# Altium PCB AMC_Single_uBACKPLANE.PcbDoc (part 2 of 2)
Units mm, origin at the board's own origin, x right, y up, seen from the top; angles counter-clockwise.
Board outline 54.63 x 82.6 mm, 4 copper layers (TOP, GND, PWR, BTM), stack 1.618 mm thick; 29 components, 100 nets, 344 pads, 209 vias.
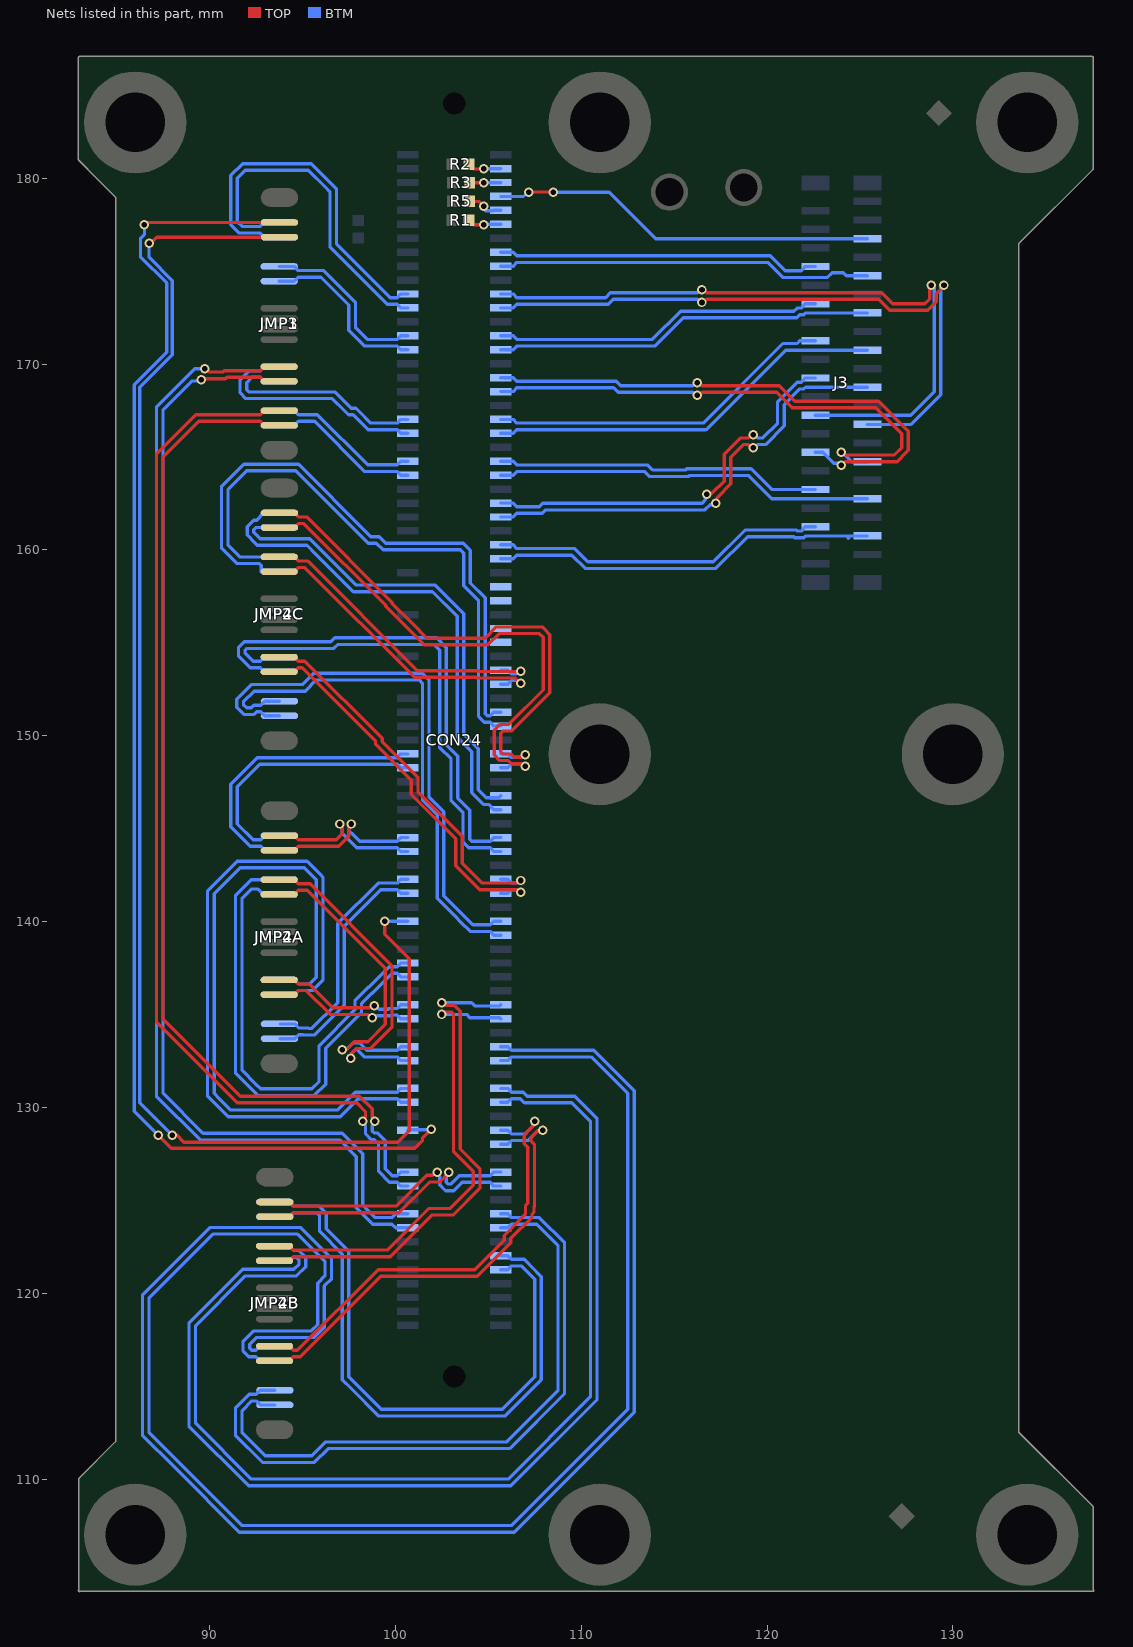
[diagram p4: the nets of this part, all layers, seen from the top]

## Via types
v1: diameter 0.5, hole 0.3, TOP to BTM, tented both sides, 99 vias
v2: diameter 0.51, hole 0.3, TOP to BTM, tented both sides, 88 vias
v3: diameter 0.51, hole 0.3, TOP to BTM, 12 vias
v4: diameter 0.5, hole 0.2, TOP to BTM, tented both sides, 10 vias

## Nets (pads, with @x,y where several pads share a name; then routed paths per layer and width w, separated by ;. In a path a pad name is that pad's centre, name@x,y a point inside that pad or via, vN(x,y) a via of type N, cw(c..) or ccw(c..) an arc to the next point about the centre after c; other vN are vias at no path point) (continued)
QRX2A_N: CON24.54 JMP4A.2 | length 12.8
  BTM w0.178: JMP4A.2@93.794,133.7 94.592,133.7 94.809,133.917 95.026,133.917 95.049,133.894 95.647,133.894 97.25,135.497 97.25,139.75 99.217,141.717 100.102,141.717 100.299,141.52 CON24.54@100.674,141.52
QRX2A_P: CON24.53 JMP4A.3 | length 12.8
  BTM w0.178: JMP4A.3@93.794,134.49 94.592,134.49 94.809,134.273 95.322,134.273 95.345,134.25 95.5,134.25 96.894,135.644 96.894,139.897 99.07,142.073 100.102,142.073 100.299,142.27 CON24.53@100.674,142.27
QRX2B_N: CON24.93 JMP4B.2 | length 33.7
  BTM w0.178: JMP4B.2@93.522,113.99 92.724,113.99 92.507,114.207 92.281,114.207 91.75,113.676 91.75,112.5 93,111.25 95.497,111.25 96.247,112 105.997,112 108.75,114.753 108.75,122.57 107.603,123.717 106.246,123.717 106.049,123.52 CON24.93@105.674,123.52
QRX2B_P: CON24.94 JMP4B.3 | length 36
  BTM w0.178: JMP4B.3@93.522,114.78 92.724,114.78 92.507,114.563 92.134,114.563 91.394,113.824 91.394,112.353 92.853,110.894 95.644,110.894 96.394,111.644 106.144,111.644 109.106,114.606 109.106,122.717 107.75,124.073 106.246,124.073 106.049,124.27 CON24.94@105.674,124.27
QRX2C_N: CON24.115 JMP4C.2 | length 29.8
  BTM w0.178: JMP4C.2@93.772,151.07 92.974,151.07 92.757,151.287 92.54,151.287 92.397,151.144 91.853,151.144 91.469,151.528 91.469,151.969 92.251,152.751 94.999,152.751 95.603,153.356 101.438,153.356 101.813,152.98 101.813,146.689 102.606,145.897 102.606,141.394 104.177,139.823 105.102,139.823 105.299,140.02 CON24.115@105.674,140.02
QRX2C_P: CON24.114 JMP4C.3 | length 28.7
  BTM w0.178: JMP4C.3@93.772,151.86 92.974,151.86 92.757,151.643 92.392,151.643 92.249,151.5 92,151.5 91.825,151.675 91.825,151.822 92.399,152.396 95.146,152.396 95.75,153 101.29,153 101.458,152.832 101.458,146.542 102.25,145.75 102.25,141.247 103.247,140.25 103.499,139.999 104.03,139.467 105.102,139.467 105.299,139.27 CON24.114@105.674,139.27
QRX3A_N: CON24.63 JMP2A.11 | length 7.8
  TOP w0.178: JMP2A.11@93.75,136.07 94.548,136.07 94.765,136.287 95.21,136.287 96.496,135.001 98.489,135.001 98.66,134.83 v2(98.75,134.83)
  BTM w0.178: v2(98.75,134.83) 98.814,134.894 98.98,134.894 99.02,134.933 99.767,134.933 99.801,134.967 100.102,134.967 100.299,134.77 CON24.63@100.674,134.77
QRX3A_P: CON24.62 JMP2A.10 | length 7.8
  TOP w0.178: JMP2A.10@93.75,136.86 94.548,136.86 94.765,136.643 95.357,136.643 95.75,136.25 96.644,135.356 98.596,135.356 98.636,135.396 98.802,135.396 v2(98.866,135.46)
  BTM w0.178: v2(98.866,135.46) 98.956,135.46 99.127,135.289 99.62,135.289 99.653,135.323 100.102,135.323 100.299,135.52 CON24.62@100.674,135.52
QRX3B_N: CON24.99 JMP2B.11 | length 25
  TOP w0.178: JMP2B.11@93.5,116.36 94.298,116.36 94.515,116.577 94.88,116.577 99.217,120.914 104.417,120.914 106.216,122.713 106.216,122.96 107.356,124.1 107.356,124.25 107.457,124.352 107.457,124.651 107.489,124.683 107.489,128 107.292,128.197 107.292,128.345 107.395,128.448 107.395,128.482 107.63,128.718 107.859,128.718 v2(107.922,128.781)
  BTM w0.178: CON24.99@105.674,128.02 106.049,128.02 106.246,128.217 107.13,128.217 107.63,128.718 107.859,128.718 v2(107.922,128.781)
QRX3B_P: CON24.100 JMP2B.10 | length 24.4
  TOP w0.178: JMP2B.10@93.5,117.15 94.298,117.15 94.515,116.933 94.732,116.933 99.07,121.27 104.27,121.27 105.86,122.86 105.86,123.107 107,124.247 107,124.697 107.133,124.83 107.133,127.853 106.936,128.05 106.936,128.492 107.039,128.595 107.039,128.63 107.436,129.027 107.436,129.186 v2(107.5,129.25)
  BTM w0.178: CON24.100@105.674,128.77 106.049,128.77 106.246,128.573 106.982,128.573 107.436,129.027 107.436,129.186 v2(107.5,129.25)
QRX3C_N: CON24.117 JMP2C.11 | length 20.7
  TOP w0.178: JMP2C.11@93.75,153.44 94.548,153.44 94.765,153.657 94.982,153.657 98.934,149.706 98.934,149.538 100.86,147.612 100.86,146.837 103.25,144.447 103.25,142.997 104.53,141.717 106.523,141.717 106.66,141.58 v2(106.75,141.58)
  BTM w0.178: CON24.117@105.674,141.52 106.049,141.52 106.246,141.717 106.523,141.717 106.66,141.58 v2(106.75,141.58)
QRX3C_P: CON24.118 JMP2C.10 | length 20.7
  TOP w0.178: JMP2C.10@93.75,154.23 94.548,154.23 94.765,154.013 95.13,154.013 99.289,149.853 99.289,149.685 101.216,147.759 101.216,146.985 103.606,144.594 103.606,143.144 104.677,142.073 106.523,142.073 106.66,142.21 v2(106.75,142.21)
  BTM w0.178: CON24.118@105.674,142.27 106.049,142.27 106.246,142.073 106.523,142.073 106.66,142.21 v2(106.75,142.21)
QRX4A_N: CON24.69 JMP4A.4 | length 38.2
  BTM w0.178: JMP4A.4@93.772,136.07 94.57,136.07 94.787,136.287 95.54,136.287 96.106,136.853 96.106,142.397 96.001,142.501 95.251,143.252 91.499,143.252 89.894,141.647 89.894,130.603 90.499,129.999 90.997,129.5 97.033,129.5 98,130.467 100.102,130.467 100.299,130.27 CON24.69@100.674,130.27
QRX4A_P: CON24.68 JMP4A.5 | length 35.8
  BTM w0.178: JMP4A.5@93.772,136.86 94.57,136.86 94.787,136.643 95.393,136.643 95.75,137 95.75,142.25 95.103,142.897 91.647,142.897 90.25,141.5 90.25,130.75 90.499,130.501 91.144,129.856 96.886,129.856 97.853,130.823 100.102,130.823 100.299,131.02 CON24.68@100.674,131.02
QRX4B_N: CON24.105 JMP4B.4 | length 84.3
  BTM w0.178: JMP4B.4@93.5,116.36 92.702,116.36 92.485,116.577 92.12,116.577 91.808,116.89 91.808,117.41 92.369,117.971 95.471,117.971 95.819,118.319 95.819,120.54 96.211,120.932 96.211,121.716 94.74,123.187 90.187,123.187 86.75,119.75 86.75,112.5 88.5,110.75 91.75,107.5 106.25,107.5 112.5,113.75 112.5,130.75 110.75,132.5 110.533,132.717 106.246,132.717 106.049,132.52 CON24.105@105.674,132.52
QRX4B_P: CON24.106 JMP4B.5 | length 86.6
  BTM w0.178: JMP4B.5@93.5,117.15 92.702,117.15 92.485,116.933 92.268,116.933 92.163,117.037 92.163,117.263 92.516,117.616 95.618,117.616 96.174,118.171 96.174,120.392 96.567,120.785 96.567,121.863 95.715,122.715 95.158,123.272 94.888,123.542 90.039,123.542 86.394,119.897 86.394,112.353 88.123,110.624 91.603,107.144 106.397,107.144 112.856,113.603 112.856,130.897 111.253,132.5 110.68,133.073 106.246,133.073 106.049,133.27 CON24.106@105.674,133.27
QRX4C_N: CON24.121 JMP4C.4 | length 27.2
  BTM w0.178: JMP4C.4@93.75,153.44 92.952,153.44 92.735,153.657 92.196,153.657 91.556,154.297 91.556,154.739 91.868,155.051 96.537,155.051 96.75,155.265 102.221,155.265 102.747,154.739 102.747,149.506 103.356,148.897 103.356,146.644 104,146 104,144.427 104.104,144.323 105.102,144.323 105.299,144.52 CON24.121@105.674,144.52
QRX4C_P: CON24.120 JMP4C.5 | length 26.1
  BTM w0.178: JMP4C.5@93.75,154.23 92.952,154.23 92.735,154.013 92.343,154.013 91.912,154.444 91.912,154.591 92.016,154.695 96.684,154.695 96.897,154.909 102.074,154.909 102.391,154.591 102.391,149.359 103,148.75 103,146.497 103.644,145.853 103.644,144.28 103.957,143.967 105.102,143.967 105.299,143.77 CON24.120@105.674,143.77
QTX1A_N: CON24.45 JMP4A.13 | length 14.5
  BTM w0.178: JMP4A.13@93.772,144.62 92.974,144.62 92.757,144.403 92.347,144.403 91.5,145.25 91.5,147.25 92.717,148.467 100.102,148.467 100.299,148.27 CON24.45@100.674,148.27
QTX1A_P: CON24.44 JMP4A.12 | length 15.7
  BTM w0.178: JMP4A.12@93.772,143.83 92.974,143.83 92.757,144.047 92.2,144.047 91.144,145.103 91.144,147.397 92.57,148.823 100.102,148.823 100.299,149.02 CON24.44@100.674,149.02
QTX1B_N: CON24.90 JMP4B.13 | length 31.2
  BTM w0.178: JMP4B.13@93.5,124.91 94.298,124.91 94.515,124.693 95.897,124.693 96.279,124.311 96.279,123.471 97.5,122.25 97.5,115.5 98,115 99.25,113.75 105.747,113.75 107.5,115.503 107.5,120.75 106.783,121.467 106.246,121.467 106.049,121.27 CON24.90@105.674,121.27
QTX1B_P: CON24.91 JMP4B.12 | length 32.4
  BTM w0.178: JMP4B.12@93.5,124.12 94.298,124.12 94.515,124.337 95.75,124.337 95.923,124.164 95.923,123.324 97.144,122.103 97.144,115.353 97.623,114.874 99.103,113.394 105.894,113.394 107.856,115.356 107.856,120.897 107.647,121.106 107.501,121.251 106.93,121.823 106.246,121.823 106.049,122.02 CON24.91@105.674,122.02
QTX1C_N: CON24.123 JMP4C.13 | length 27.3
  BTM w0.178: JMP4C.13@93.75,161.99 92.925,161.99 92.535,161.6 92.382,161.6 92.025,161.243 92.025,160.801 92.129,160.697 92.328,160.499 92.576,160.25 95.247,160.25 95.749,159.749 97.747,157.75 102,157.75 103.325,156.425 103.325,149.925 104.104,149.146 104.104,146.94 104.741,146.303 105.016,146.303 105.299,146.02 CON24.123@105.674,146.02
QTX1C_P: CON24.124 JMP4C.12 | length 25.9
  BTM w0.178: JMP4C.12@93.75,161.2 92.485,161.2 92.381,161.096 92.381,160.949 92.724,160.606 95.394,160.606 95.749,160.251 97.894,158.106 102.147,158.106 103.68,156.573 103.68,150.073 104.46,149.293 104.46,147.088 104.889,146.659 105.563,146.659 CON24.124@105.674,146.77
QTX2A_N: CON24.51 JMP2A.2 | length 8.7
  TOP w0.178: JMP2A.2@93.772,144.62 94.57,144.62 94.787,144.403 96.819,144.403 97.144,144.728 97.144,145.023 97.007,145.16 v2(97.007,145.25)
  BTM w0.178: v2(97.007,145.25) 97.007,145.16 97.144,145.023 97.144,144.75 97.927,143.967 100.102,143.967 100.299,143.77 CON24.51@100.674,143.77
QTX2A_P: CON24.50 JMP2A.3 | length 8.7
  TOP w0.178: JMP2A.3@93.772,143.83 94.57,143.83 94.787,144.047 96.966,144.047 97.5,144.581 97.5,145.023 97.637,145.16 v2(97.637,145.25)
  BTM w0.178: v2(97.637,145.25) 97.637,145.16 97.5,145.023 97.5,144.897 97.751,144.646 98.075,144.323 100.102,144.323 100.299,144.52 CON24.50@100.674,144.52
QTX2B_N: CON24.96 JMP2B.2 | length 14
  TOP w0.178: JMP2B.2@93.522,124.91 94.32,124.91 94.537,124.693 100.047,124.693 101.696,126.342 102.002,126.342 102.16,126.5 v2(102.25,126.5)
  BTM w0.178: v2(102.25,126.5) 102.25,126.41 102.387,126.273 102.387,125.831 102.7,125.519 103.142,125.519 103.59,125.967 105.102,125.967 105.299,125.77 CON24.96@105.674,125.77
QTX2B_P: CON24.97 JMP2B.3 | length 14.2
  TOP w0.178: JMP2B.3@93.522,124.12 94.32,124.12 94.537,124.337 100.194,124.337 101.843,125.986 102.392,125.986 102.88,126.474 v2(102.88,126.5)
  BTM w0.178: v2(102.88,126.5) 102.88,126.41 102.743,126.273 102.743,125.978 102.847,125.874 102.994,125.874 103.443,126.323 105.102,126.323 105.299,126.52 CON24.97@105.674,126.52
QTX2C_N: CON24.127 JMP2C.2 | length 28.4
  TOP w0.178: JMP2C.2@93.772,161.99 94.57,161.99 94.787,161.773 95.23,161.773 99.839,157.164 99.839,157.108 100.925,156.021 101.697,155.25 104.832,155.25 105.438,155.856 107.897,155.856 108.001,155.751 108.313,155.44 108.313,152.313 106.25,150.25 105.778,150.25 105.674,150.146 105.674,149.124 105.778,149.02 106.223,149.02 106.399,148.843 106.773,148.843 106.91,148.981 v2(107,148.981)
  BTM w0.178: CON24.127@105.674,149.02 106.049,149.02 106.226,148.843 106.773,148.843 106.91,148.981 v2(107,148.981)
QTX2C_P: CON24.126 JMP2C.3 | length 28.4
  TOP w0.178: JMP2C.3@93.772,161.2 94.57,161.2 94.787,161.417 95.083,161.417 99.484,157.016 99.484,156.96 100.8,155.644 101.55,154.894 104.98,154.894 105.585,155.5 107.75,155.5 107.958,155.293 107.958,152.46 106.103,150.606 105.631,150.606 105.318,150.293 105.318,148.977 105.631,148.664 106.076,148.664 106.252,148.488 106.773,148.488 106.91,148.351 v2(107,148.351)
  BTM w0.178: CON24.126@105.674,148.27 106.049,148.27 106.267,148.488 106.773,148.488 106.91,148.351 v2(107,148.351)
QTX3A_N: CON24.60 JMP4A.11 | length 26.3
  BTM w0.178: JMP4A.11@93.772,142.25 92.247,142.25 91.394,141.397 91.394,131.853 92.249,130.999 92.603,130.644 95.647,130.644 96.25,131.247 96.25,133.177 98.183,135.11 98.183,135.594 98.728,136.139 98.754,136.139 99.832,137.217 100.102,137.217 100.299,137.02 CON24.60@100.674,137.02
QTX3A_P: CON24.59 JMP4A.10 | length 25.2
  BTM w0.178: JMP4A.10@93.772,141.46 92.902,141.46 92.612,141.75 92.25,141.75 91.75,141.25 91.75,132 92.5,131.25 92.75,131 95.5,131 95.894,131.394 95.894,133.324 97.828,135.258 97.828,135.742 98.58,136.494 98.606,136.494 99.685,137.573 100.102,137.573 100.299,137.77 CON24.59@100.674,137.77
QTX3B_N: CON24.102 JMP4B.11 | length 59.5
  BTM w0.178: JMP4B.11@93.5,122.54 94.298,122.54 94.538,122.3 94.81,122.3 95.174,121.936 95.174,121.421 94.682,120.929 91.929,120.929 89.25,118.25 89.25,113 92.25,110 106.07,110 110.5,114.43 110.5,129.25 110.25,129.5 109.5,130.25 106.948,130.25 106.731,130.467 106.246,130.467 106.049,130.27 CON24.102@105.674,130.27
QTX3B_P: CON24.103 JMP4B.10 | length 60.6
  BTM w0.178: JMP4B.10@93.5,121.75 94.321,121.75 94.515,121.945 94.663,121.945 94.818,121.789 94.818,121.568 94.535,121.284 91.782,121.284 88.894,118.397 88.894,112.853 92.103,109.644 106.217,109.644 110.856,114.283 110.856,129.397 109.647,130.606 107.096,130.606 106.878,130.823 106.246,130.823 106.049,131.02 CON24.103@105.674,131.02
QTX3C_N: CON24.129 JMP4C.11 | length 31.5
  BTM w0.178: JMP4C.11@93.75,159.62 91.63,159.62 91,160.25 91,163.25 92,164.25 94.644,164.25 98.536,160.359 98.985,160.359 99.344,160 103.5,160 103.679,159.821 103.679,158.071 104.477,157.273 104.477,151.03 104.789,150.717 105.102,150.717 105.299,150.52 CON24.129@105.674,150.52
QTX3C_P: CON24.130 JMP4C.10 | length 33
  BTM w0.178: JMP4C.10@92.778,158.83 92.778,159.16 92.674,159.264 91.483,159.264 90.644,160.103 90.644,163.397 91.853,164.606 94.792,164.606 98.501,160.896 98.683,160.714 99.132,160.714 99.491,160.356 103.647,160.356 104.035,159.968 104.035,158.218 104.832,157.421 104.832,151.177 104.936,151.073 105.102,151.073 105.299,151.27 CON24.130@105.674,151.27 ; JMP4C.10@92.828,158.78 92.878,158.83 JMP4C.10@93.75,158.83
QTX4A_N: CON24.66 JMP2A.4 | length 17.7
  TOP w0.178: JMP2A.4@93.75,142.25 94.548,142.25 94.765,142.033 95.419,142.033 99.819,137.633 99.819,134.316 98.676,133.173 97.926,133.173 97.662,132.909 97.662,132.715 v2(97.598,132.652)
  BTM w0.178: 97.662,132.909 97.87,133.117 97.925,133.117 98.325,132.717 100.102,132.717 100.299,132.52 CON24.66@100.674,132.52
QTX4A_P: CON24.65 JMP2A.5 | length 17.1
  TOP w0.178: JMP2A.5@93.75,141.46 94.548,141.46 94.765,141.677 95.272,141.677 99.464,137.486 99.464,134.464 98.529,133.529 97.779,133.529 97.411,133.161 97.217,133.161 v2(97.153,133.097)
  BTM w0.178: 97.411,133.161 97.723,133.473 98.072,133.473 98.472,133.073 100.102,133.073 100.299,133.27 CON24.65@100.674,133.27
QTX4B_N: CON24.108 JMP2B.4 | length 25.9
  TOP w0.178: JMP2B.4@93.5,122.54 94.298,122.54 94.515,122.323 99.573,122.323 101.811,124.561 102.955,124.561 104.197,125.803 104.197,126.553 104,126.75 103.239,127.511 103.135,127.615 103.135,135.024 103.022,135.137 102.727,135.137 102.59,135 v2(102.5,135)
  BTM w0.178: v2(102.5,135) 103.839,135 104.009,134.83 105.614,134.83 CON24.108@105.674,134.77
QTX4B_P: CON24.109 JMP2B.5 | length 27.1
  TOP w0.178: JMP2B.5@93.5,121.75 94.298,121.75 94.515,121.967 99.72,121.967 101.958,124.205 103.103,124.205 104.553,125.656 104.553,126.7 103.491,127.762 103.491,135.171 103.169,135.493 102.727,135.493 102.59,135.63 v2(102.5,135.63)
  BTM w0.178: v2(102.5,135.63) 104.099,135.63 104.269,135.46 105.614,135.46 CON24.109@105.674,135.52
QTX4C_N: CON24.133 JMP2C.4 | length 16.8
  TOP w0.178: JMP2C.4@93.75,159.62 94.548,159.62 94.765,159.403 95.277,159.403 101.18,153.5 104.477,153.5 104.517,153.46 v2(106.75,153.46)
  BTM w0.178: CON24.133@105.674,153.52 106.049,153.52 106.246,153.323 106.523,153.323 106.66,153.46 v2(106.75,153.46)
QTX4C_P: CON24.132 JMP2C.5 | length 16.9
  TOP w0.178: JMP2C.5@93.75,158.83 94.548,158.83 94.765,159.047 95.13,159.047 101.033,153.144 104.329,153.144 104.369,153.104 106.45,153.104 106.724,152.83 v2(106.75,152.83)
  BTM w0.178: CON24.132@105.674,152.77 106.049,152.77 106.246,152.967 106.523,152.967 106.66,152.83 v2(106.75,152.83)
RX0_N: CON24.15 JMP1.10 | length 9.4
  BTM w0.178: JMP1.10@93.75,174.46 94.548,174.46 94.765,174.677 96,174.677 97.5,173.177 97.5,171.82 98.353,170.967 100.102,170.967 100.299,170.77 CON24.15@100.674,170.77
RX0_P: CON24.14 JMP1.11 | length 9.4
  BTM w0.178: JMP1.11@93.75,175.25 94.548,175.25 94.765,175.033 96.147,175.033 97.856,173.324 97.856,171.967 98.5,171.323 100.102,171.323 100.299,171.52 CON24.14@100.674,171.52
RX1_N: CON24.24 JMP1.2 | length 8.2
  BTM w0.178: JMP1.2@93.772,166.7 94.57,166.7 94.787,166.917 95.66,166.917 98.36,164.217 100.102,164.217 100.299,164.02 CON24.24@100.674,164.02
RX1_P: CON24.23 JMP1.3 | length 8.2
  BTM w0.178: JMP1.3@93.772,167.49 94.57,167.49 94.787,167.273 95.808,167.273 98.508,164.573 100.102,164.573 100.299,164.77 CON24.23@100.674,164.77
RX17_N: CON24.141 J3.4 | length 21
  BTM w0.178: CON24.141@105.674,159.52 106.338,159.52 106.535,159.717 109.5,159.717 110.217,159 116.919,159 117.253,159 118.967,160.714 121.442,160.714 121.497,160.659 121.982,160.659 122.073,160.75 124.488,160.75 ; 124.369,160.631 124.488,160.75 ; J3.4@125.4,160.75 124.488,160.75
RX17_P: CON24.142 J3.5 | length 18.1
  BTM w0.178: CON24.142@105.674,160.27 106.338,160.27 106.535,160.073 109.647,160.073 110.364,159.356 116.772,159.356 117.106,159.356 118.82,161.07 121.589,161.07 121.644,161.015 121.835,161.015 121.939,161.119 121.939,161.139 122.05,161.25 J3.5@122.6,161.25
RX18_N: CON24.147 J3.8 | length 20.5
  BTM w0.178: CON24.147@105.674,164.02 106.338,164.02 106.535,164.217 113.415,164.217 113.525,164.108 113.687,163.945 115.769,163.945 115.827,164.003 118.994,164.003 120.247,162.75 J3.8@125.4,162.75
RX18_P: CON24.148 J3.9 | length 17.6
  BTM w0.178: CON24.148@105.674,164.77 106.338,164.77 106.535,164.573 113.563,164.573 113.834,164.301 115.621,164.301 115.679,164.359 119.141,164.359 120.25,163.25 121.761,163.25 J3.9@122.6,163.25
RX19_N: CON24.153 J3.12 | length 28.6
  TOP w0.178: v2(116.25,168.312) 116.34,168.312 116.506,168.478 120.522,168.478 121.356,167.644 125.856,167.644 127.25,166.25 127.25,165.5 126.856,165.106 124.144,165.106 v2(124,165.25)
  BTM w0.178: CON24.153@105.674,168.52 106.338,168.52 106.535,168.717 111.744,168.717 111.983,168.478 115.994,168.478 116.16,168.312 v2(116.25,168.312) ; v2(124,165.25) 124.061,165.25 124.561,164.75 J3.12@125.4,164.75
RX19_P: CON24.154 J3.13 | length 29.9
  TOP w0.178: v2(116.25,169) 116.34,169 116.506,168.834 120.669,168.834 121.503,168 126.003,168 127.501,166.501 127.606,166.397 127.606,165.353 127.501,165.249 127.003,164.75 124.238,164.75 124.216,164.728 124.166,164.728 v2(124,164.562)
  BTM w0.178: CON24.154@105.674,169.27 106.338,169.27 106.535,169.073 111.891,169.073 112.13,168.834 115.994,168.834 116.16,169 v2(116.25,169) ; J3.13@122.6,165.25 123,165.25 123.591,164.659 123.903,164.659 v2(124,164.562)
RX20_N: CON24.159 J3.16 | length 35.8
  TOP w0.178: v2(116.5,173.312) 116.59,173.312 116.756,173.478 126.022,173.478 126.606,172.894 128.647,172.894 129.106,173.353 129.106,173.784 129.522,174.2 v2(129.522,174.25)
  BTM w0.178: CON24.159@105.674,173.02 106.338,173.02 106.535,173.217 111.457,173.217 111.718,173.478 116.244,173.478 116.41,173.312 v2(116.5,173.312) ; J3.16@125.4,166.75 127.75,166.75 129.356,168.356 129.356,174.084 v2(129.522,174.25)
RX20_P: CON24.160 J3.17 | length 37.3
  TOP w0.178: v2(116.5,174) 116.59,174 116.756,173.834 126.169,173.834 126.753,173.25 128.5,173.25 128.75,173.5 128.75,174.166 v2(128.834,174.25)
  BTM w0.178: CON24.160@105.674,173.77 106.338,173.77 106.535,173.573 111.309,173.573 111.571,173.834 116.244,173.834 116.41,174 v2(116.5,174) ; J3.17@122.6,167.25 127.747,167.25 129,168.503 129,174.084 v2(128.834,174.25)
SCL_L: CON24.56 JMP3.3 | length 83.4
  TOP w0.178: v2(86.75,176.5) 86.828,176.5 87.158,176.83 JMP3.3@93.772,176.83 ; v2(88,128.5) 88.051,128.551 88.199,128.551 88.624,128.126 100.126,128.126 100.75,128.75 100.75,138 99.424,139.326 v2(99.424,140.02)
  BTM w0.178: v2(86.75,176.5) 86.75,175.737 88,174.487 88,170.5 86.25,168.75 86.25,130.25 v2(88,128.5) ; v2@99.404,140 v2(99.424,140.02) CON24.56@100.674,140.02
SDA_L: CON24.71 JMP3.2 | length 75
  TOP w0.178: v2(86.5,177.5) 86.59,177.5 86.71,177.62 JMP3.2@93.772,177.62 ; v2(87.25,128.5) 87.947,127.803 101.053,127.803 101.46,128.21 101.46,128.349 v2(101.93,128.82)
  BTM w0.178: v2(86.5,177.5) 86.5,176.966 86.286,176.752 86.286,175.779 87.702,174.363 87.702,170.623 85.952,168.873 85.952,129.798 v2(87.25,128.5) ; CON24.71@100.674,128.77 100.699,128.795 101.905,128.795 v2(101.93,128.82)
TCK: CON24.165 R1.2 | length 1.8
  TOP w0.178: R1.2@103.97,177.75 103.97,177.73 104.171,177.529 104.191,177.529 104.22,177.5 v2(104.75,177.5)
  BTM w0.178: v2(104.75,177.5) 104.77,177.52 CON24.165@105.674,177.52
TCLKA_N: CON24.75 JMP3.12 | length 56.7
  TOP w0.178: JMP3.12@93.75,167.49 92.952,167.49 92.735,167.273 89.27,167.273 87.144,165.147 87.144,134.603 91.497,130.25 97.916,130.25 98.394,129.772 98.394,129.477 98.257,129.34 v2(98.257,129.25)
  BTM w0.178: 98.394,129.023 98.394,128.581 98.707,128.269 98.876,128.269 99.098,128.046 99.098,126.554 99.685,125.967 100.102,125.967 100.299,125.77 CON24.75@100.674,125.77
TCLKA_P: CON24.74 JMP3.13 | length 55.5
  TOP w0.178: JMP3.13@93.75,166.7 92.952,166.7 92.735,166.917 89.417,166.917 87.5,165 87.5,134.75 91.644,130.606 98.063,130.606 98.75,129.919 98.75,129.477 98.887,129.34 v2(98.887,129.25)
  BTM w0.178: 98.75,129.023 98.75,128.728 98.854,128.624 99.023,128.624 99.454,128.194 99.454,126.701 99.832,126.323 100.102,126.323 100.299,126.52 CON24.74@100.674,126.52
TCLKB_N: CON24.78 JMP3.10 | length 62.8
  TOP w0.178: v2(89.75,169.75) 89.838,169.75 90.02,169.567 90.717,169.567 90.793,169.643 92.735,169.643 92.952,169.86 JMP3.10@93.75,169.86
  BTM w0.178: v2(89.75,169.75) 89.207,169.75 87.144,167.687 87.144,130.606 89.5,128.25 97,128.25 97.894,127.356 97.894,124.603 98.78,123.717 99.813,123.717 100.01,123.52 CON24.78@100.674,123.52
TCLKB_P: CON24.77 JMP3.11 | length 61.5
  TOP w0.178: v2(89.563,169.148) 89.627,169.212 90.865,169.212 90.94,169.287 92.735,169.287 92.952,169.07 JMP3.11@93.75,169.07
  BTM w0.178: v2(89.563,169.148) 89.5,169.085 89.045,169.085 87.5,167.54 87.5,130.753 89.647,128.606 97.147,128.606 97.626,128.126 98.25,127.503 98.25,124.75 98.5,124.5 98.927,124.073 99.813,124.073 100.01,124.27 CON24.77@100.674,124.27
TCLKC_N: CON24.135
TCLKC_P: CON24.136
TCLKD_N: CON24.138
TCLKD_P: CON24.139
TDI: CON24.169 R2.2 | length 1.8
  TOP w0.178: R2.2@103.97,180.75 103.97,180.73 104.171,180.529 104.191,180.529 104.22,180.5 v2(104.75,180.5)
  BTM w0.178: v2(104.75,180.5) 104.76,180.51 105.664,180.51 CON24.169@105.674,180.52
TDO: CON24.168 R3.2 | length 1.7
  TOP w0.178: R3.2@104,179.75 v2(104.75,179.75)
  BTM w0.178: v2(104.75,179.75) 104.76,179.76 105.664,179.76 CON24.168@105.674,179.77
TMS: CON24.166 R5.2 | length 2
  TOP w0.178: R5.2@104,178.75 104.492,178.75 104.742,178.5 v2(104.75,178.5)
  BTM w0.178: v2(104.75,178.5) 104.814,178.436 104.814,178.291 104.854,178.25 105.25,178.25 105.27,178.27 CON24.166@105.674,178.27
TRST#: CON24.167 J3.36 | length 20.9
  TOP w0.152: v2(107.174,179.25) v2(108.5,179.25)
  BTM w0.152: CON24.167@105.674,179.02 106.904,179.02 107.134,179.25 v2(107.174,179.25)
  BTM w0.178: v2(108.5,179.25) 111.5,179.25 114,176.75 J3.36@125.4,176.75
TX0_N: CON24.12 JMP1.13 | length 18.9
  BTM w0.178: JMP1.13@93.75,177.62 92.952,177.62 92.735,177.403 91.75,177.403 91.5,177.653 91.5,180 91.925,180.425 95.325,180.425 96.25,179.5 96.48,179.27 96.48,176.307 99.57,173.217 100.102,173.217 100.299,173.02 CON24.12@100.674,173.02
TX0_P: CON24.11 JMP1.12 | length 20.1
  BTM w0.178: JMP1.12@93.75,176.83 92.952,176.83 92.735,177.047 91.603,177.047 91.144,177.506 91.144,180.147 91.778,180.78 95.472,180.78 96.835,179.417 96.835,176.454 99.717,173.573 100.102,173.573 100.299,173.77 CON24.11@100.674,173.77
TX1_N: CON24.21 JMP1.5 | length 13
  BTM w0.178: JMP1.5@93.75,169.86 92.952,169.86 92.735,169.643 92.14,169.643 91.644,169.147 91.644,168.457 91.957,168.144 96.606,168.144 97.25,167.5 97.48,167.27 97.727,167.27 98.53,166.467 100.102,166.467 100.299,166.27 CON24.21@100.674,166.27
TX1_P: CON24.20 JMP1.4 | length 11.9
  BTM w0.178: JMP1.4@92.892,169.01 JMP1.4@92.952,169.07 ; JMP1.4@93.75,169.07 JMP1.4@92.952,169.07 ; CON24.20@100.674,167.02 100.299,167.02 100.102,166.823 98.677,166.823 98,167.5 97.874,167.626 97.627,167.626 96.753,168.5 92.104,168.5 92,168.604 92,169 92.287,169.287 92.735,169.287 JMP1.4@92.952,169.07
TX17_N: CON24.144 J3.20 | length 24.4
  TOP w0.178: v2(117.25,162.5) 117.314,162.564 117.314,162.812 118.053,163.551 118.053,164.991 118.728,165.666 118.994,165.666 119.16,165.5 v2(119.25,165.5)
  BTM w0.178: CON24.144@105.674,161.77 106.338,161.77 106.535,161.967 107.897,161.967 108.081,162.151 116.653,162.151 116.938,162.436 117.186,162.436 v2(117.25,162.5) ; v2(119.25,165.5) 119.34,165.5 119.506,165.666 119.919,165.666 120.924,166.671 120.924,167.819 121.763,168.659 121.982,168.659 122.073,168.75 J3.20@125.4,168.75
TX17_P: CON24.145 J3.21 | length 21.7
  TOP w0.178: v2(116.75,163) 116.814,163.064 117.062,163.064 117.697,163.699 117.697,165.138 118.581,166.022 118.994,166.022 119.16,166.188 v2(119.25,166.188)
  BTM w0.178: CON24.145@105.674,162.52 106.338,162.52 106.535,162.323 107.75,162.323 107.934,162.507 116.505,162.507 116.686,162.688 116.686,162.936 v2(116.75,163) ; v2(119.25,166.188) 119.34,166.188 119.506,166.022 119.772,166.022 120.568,166.818 120.568,167.967 121.616,169.014 121.835,169.014 121.939,169.119 121.939,169.139 122.05,169.25 J3.21@122.6,169.25
TX18_N: CON24.150 J3.24 | length 21.6
  BTM w0.178: CON24.150@105.674,166.27 106.338,166.27 106.535,166.467 116.72,166.467 121.003,170.75 124.561,170.75 J3.24@125.4,170.75
TX18_P: CON24.151 J3.25 | length 18.8
  BTM w0.178: CON24.151@105.674,167.02 106.338,167.02 106.535,166.823 116.573,166.823 120.856,171.106 121.617,171.106 121.761,171.25 J3.25@122.6,171.25
TX19_N: CON24.156 J3.28 | length 20.5
  BTM w0.178: CON24.156@105.674,170.77 106.338,170.77 106.535,170.967 113.97,170.967 115.496,172.493 121.597,172.493 121.763,172.659 121.982,172.659 122.073,172.75 J3.28@125.4,172.75
TX19_P: CON24.157 J3.29 | length 17.8
  BTM w0.178: CON24.157@105.674,171.52 106.338,171.52 106.535,171.323 113.823,171.323 115.348,172.848 121.45,172.848 121.616,173.014 121.835,173.014 121.939,173.119 121.939,173.139 122.05,173.25 J3.29@122.6,173.25
TX20_N: CON24.162 J3.32 | length 20.3
  BTM w0.178: CON24.162@105.674,175.27 106.338,175.27 106.535,175.467 120.033,175.467 120.841,174.659 123.254,174.659 123.513,174.918 124.106,174.918 124.274,174.75 J3.32@125.4,174.75
TX20_P: CON24.163 J3.33 | length 17.5
  BTM w0.178: CON24.163@105.674,176.02 106.338,176.02 106.535,175.823 120.18,175.823 120.988,175.014 121.835,175.014 121.939,175.119 121.939,175.139 122.05,175.25 J3.33@122.6,175.25
pads on no net: B1.1 B2.1 B3.1 B4.1 B5.1 B6.1 B7.1 B8.1 CON24.6 CON24.8 CON24.171 CON24.172 FTG1.1 FTG2.1 FTG5.1 FTG7.1 J3.
copper on no net:
  other v1: 108.8,138.1 98.5,159.9

## Polygon pours and split planes (outlines as drawn)
AMC_P12V on TOP "NONET_L-01_P-001" (solid, remove dead copper, pour order 7): 102.25,177 102.25,170.75 101.347,169.847 101.347,157.653 102.427,156.573 107.927,156.573 108.75,155.75 108.75,152 107.75,151 107.75,148 107.5,147.75 106,147.75 102.25,151.5 100.327,151.5 99.75,150.923 99.75,149.927 107.5,142.177 107.5,141.5 106.77,140.77 102.77,140.77 102.5,140.5 102.5,139 103,138.5 107,138.5 107.5,138 107.5,133.79 104,130.29 104,128.25 104.25,128 105.673,128 107.173,129.5 108,129.5 108.25,129.25 108.25,123.25 105.25,120.25 102.5,120.25 101.5,119.25 101.5,118 102,117.5 102.101,117.601 110.351,117.601 116.25,123.5 116.25,184.5 109.75,184.5
GND on TOP "Top-No Net" (solid, remove dead copper, pour order 6): 117.25,182.25 120.25,182.25 120.25,177.25 117.25,177.25
GND on BTM "Top-No Net" (solid, remove dead copper, pour order 4): 117.25,182.25 117.25,177.25 120.25,177.25 120.25,182.25 117.25,182.25
GND on PWR (split plane): 137.04,180.691 133.189,176.84 133.126,176.763 133.079,176.674 133.05,176.579 133.04,176.479 133.04,112.521 133.05,112.421 133.079,112.326 133.126,112.237 133.189,112.16 137.04,108.309 137.04,104.471 83.471,104.471 83.471,109.821 85.311,111.66 85.374,111.737 85.421,111.826 85.45,111.921 85.46,112.021 85.46,178.979 85.45,179.079 85.421,179.174 85.374,179.263 85.311,179.34 84.328,180.323 84.354,180.348 84.352,180.352 84.348,180.354 84.323,180.328 83.46,181.191 83.46,186.04 137.04,186.04
GND on GND (split plane): 137.04,180.691 133.189,176.84 133.126,176.763 133.079,176.674 133.05,176.579 133.04,176.479 133.04,112.521 133.05,112.421 133.079,112.326 133.126,112.237 133.189,112.16 137.04,108.309 137.04,104.471 83.471,104.471 83.471,109.821 85.311,111.66 85.374,111.737 85.421,111.826 85.45,111.921 85.46,112.021 85.46,178.979 85.45,179.079 85.421,179.174 85.374,179.263 85.311,179.34 84.328,180.323 84.354,180.348 84.352,180.352 84.348,180.354 84.323,180.328 83.46,181.191 83.46,186.04 137.04,186.04

## Other copper
PWR (plane layer: these items are gaps in the copper):
  pour cut-out: 99.743,165.22 101.605,165.22 101.605,163.57 99.743,163.57
  pour cut-out: 99.743,167.47 101.605,167.47 101.605,165.82 99.743,165.82
  pour cut-out: 104.743,129.22 106.605,129.22 106.605,127.57 104.743,127.57
  pour cut-out: 99.743,122.47 101.605,122.47 101.605,120.82 99.743,120.82
  pour cut-out: 99.743,149.47 101.605,149.47 101.605,147.82 99.743,147.82
  pour cut-out: 99.743,147.22 101.605,147.22 101.605,145.57 99.743,145.57
  pour cut-out: 99.743,144.97 101.605,144.97 101.605,143.32 99.743,143.32
  pour cut-out: 99.743,142.72 101.605,142.72 101.605,141.07 99.743,141.07
  pour cut-out: 99.743,138.22 101.605,138.22 101.605,136.57 99.743,136.57
  pour cut-out: 99.743,135.97 101.605,135.97 101.605,134.32 99.743,134.32
  pour cut-out: 99.743,133.72 101.605,133.72 101.605,132.07 99.743,132.07
  pour cut-out: 99.743,131.47 101.605,131.47 101.605,129.82 99.743,129.82
  pour cut-out: 99.743,126.97 101.605,126.97 101.605,125.32 99.743,125.32
  pour cut-out: 99.743,124.72 101.605,124.72 101.605,123.07 99.743,123.07
  pour cut-out: 106.605,125.32 104.743,125.32 104.743,126.97 106.605,126.97
  pour cut-out: 106.605,123.07 104.743,123.07 104.743,124.72 106.605,124.72
  pour cut-out: 106.605,120.82 104.743,120.82 104.743,122.47 106.605,122.47
  pour cut-out: 106.605,118.57 104.743,118.57 104.743,120.22 106.605,120.22
  pour cut-out: 106.605,129.82 104.743,129.82 104.743,131.47 106.605,131.47
  pour cut-out: 104.743,133.72 106.605,133.72 106.605,132.07 104.743,132.07
  pour cut-out: 106.605,134.32 104.743,134.32 104.743,135.97 106.605,135.97
  pour cut-out: 104.743,138.22 106.605,138.22 106.605,136.57 104.743,136.57
  pour cut-out: 106.605,138.82 104.743,138.82 104.743,140.47 106.605,140.47
  pour cut-out: 104.743,142.72 106.605,142.72 106.605,141.07 104.743,141.07
  pour cut-out: 106.605,143.32 104.743,143.32 104.743,144.97 106.605,144.97
  pour cut-out: 104.743,147.22 106.605,147.22 106.605,145.57 104.743,145.57
  pour cut-out: 106.605,147.84 104.46,147.84 104.46,149.44 106.605,149.44
  pour cut-out: 104.6,151.7 106.462,151.7 106.462,150.1 104.6,150.1
  pour cut-out: 106.605,152.32 104.743,152.32 104.743,153.97 106.605,153.97
  pour cut-out: 99.798,174.22 101.659,174.22 101.659,172.57 99.798,172.57
  pour cut-out: 99.798,171.97 101.659,171.97 101.659,170.32 99.798,170.32

## Silkscreen, mask and mechanical layers (free items; w line width, h text height)
Top Overlay:
  text "AMC BOX v1.1 WUT ISE 2022" at 119.653,119.504 h1.52 r90
Bottom Overlay:
  text "LVDS" at 128.25,170.75 h1 r90
OUTLINE:
  lines w0.1: 83,104 83.011,104.011 ; 137.5,185 137.5,186 ; 83.011,104.011 83.011,110.011 85,112 85,179 84,180 83,181 83,186.5 137.5,186.5 137.5,180.5 133.5,176.5 133.5,112.5 137.5,108.5 137.5,104.043 137.532,104.011 83.011,104.011
Mechanical 8:
  lines w0.1: 86,107 148,107 ; 86,183 146,183 ; 111,99 111,183

## Text inside footprints (layer, text, board x,y; h text height)
J3: Bottom Overlay "1" at 123.6,159.1 h0.89 r270; Bottom Overlay "40P" at 123.55,179.5 h0.89 r270
JMP1: Bottom Overlay "1" at 95.761,165.16 h1.52 r270
JMP2A: Top Overlay "1" at 95.761,146.16 h1.52 r270
JMP2B: Top Overlay "1" at 95.511,126.45 h1.52 r270
JMP2C: Top Overlay "1" at 95.761,163.53 h1.52 r270
JMP3: Top Overlay "1" at 95.761,179.16 h1.52 r270
JMP4A: Bottom Overlay "1" at 95.761,132.16 h1.52 r270
JMP4B: Bottom Overlay "1" at 95.511,112.45 h1.52 r270
JMP4C: Bottom Overlay "1" at 95.761,149.53 h1.52 r270